# Altium PCB keyMANDevices.PcbDoc
Units mil, origin at the board's own origin, x right, y up, seen from the top; angles counter-clockwise.
Board outline 6000 x 4000 mil, 2 copper layers (Top Layer, Bottom Layer); 37 components, 41 nets, 181 pads, 2 vias.
Unrouted connection lines stored in the file: 95.
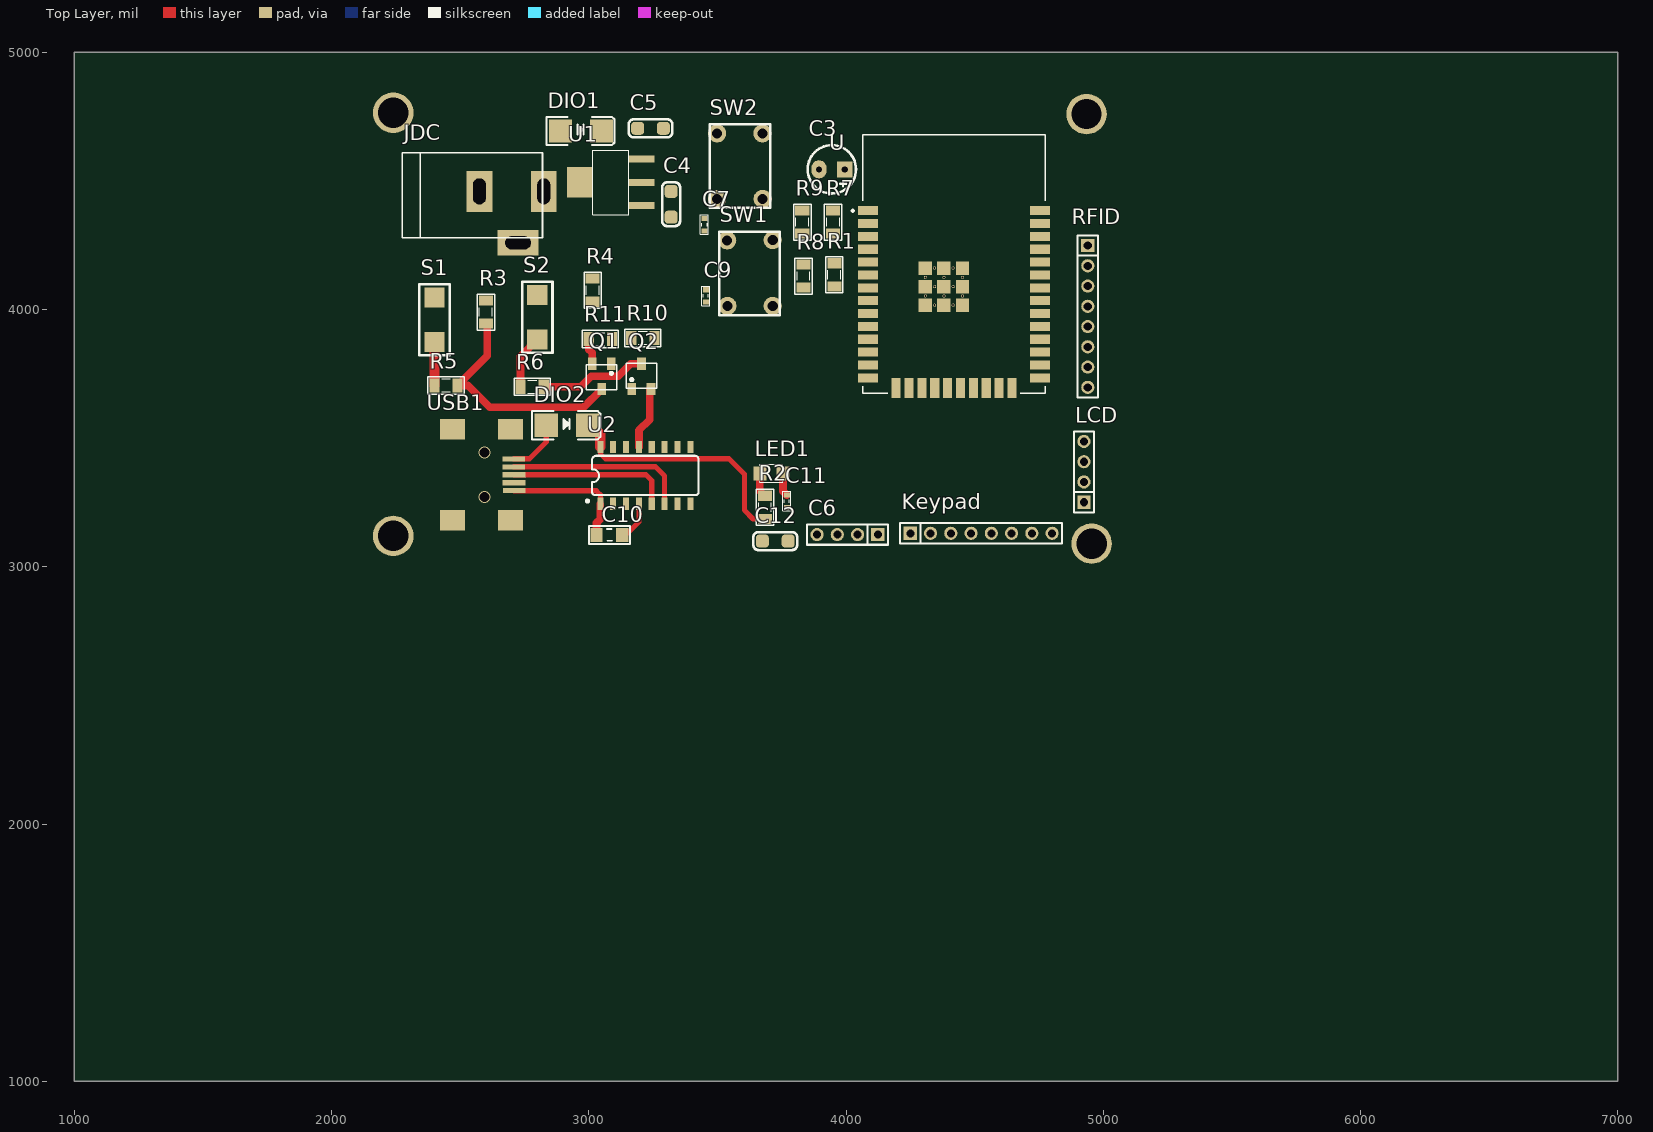
[diagram p0: Top Layer view]
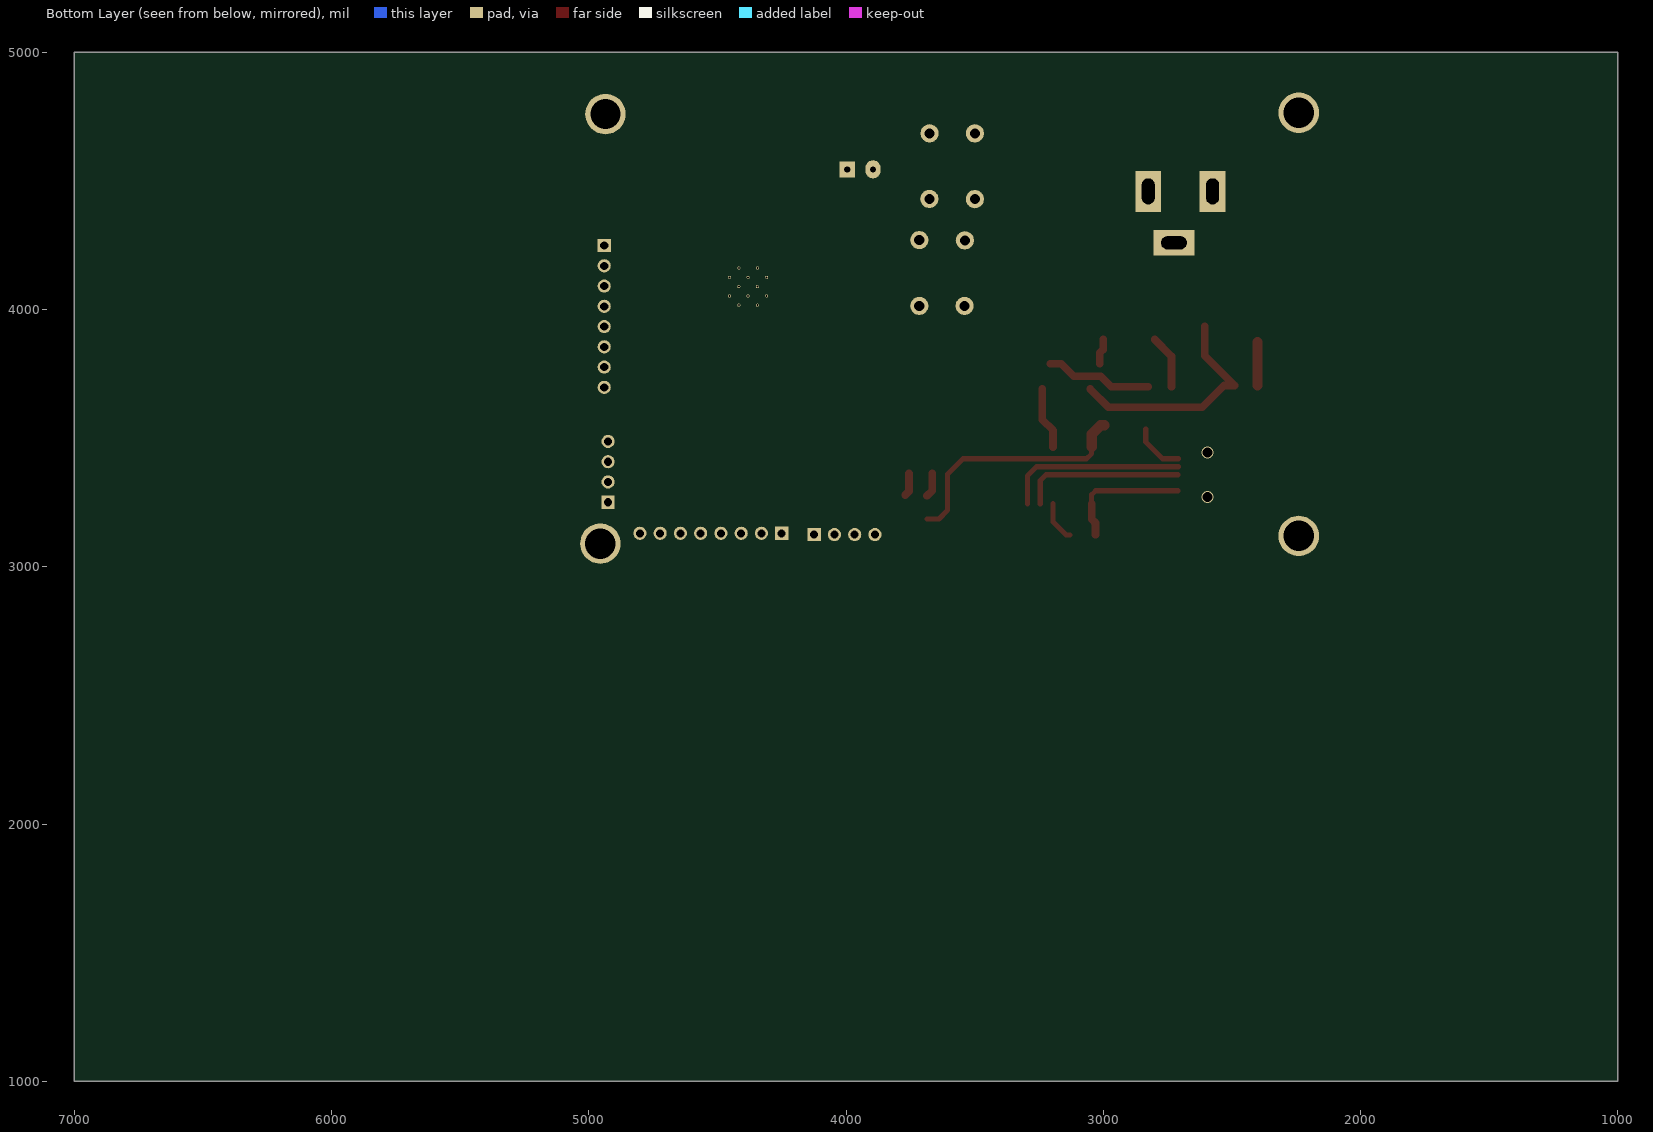
[diagram p1: Bottom Layer view, seen from below]

## Layer stack, top to bottom
Top Solder: solder mask 0.4, Solder Resist, Dk 3.5
Top Layer: signal copper 1.4
Dielectric 1: dielectric 12.6, FR-4, Dk 4.8
Bottom Layer: signal copper 1.4
Bottom Solder: solder mask 0.4, Solder Resist, Dk 3.5

## Board outline
1000,1000 7000,1000 7000,5000 1000,5000

## Design rules (kind name [scope] priority, off if disabled: settings)
Clearance [All] p1: gap=10 ignorepadtopadclearanceinfootprint=FALSE except(0: Arc-Hole Track-Hole SMDPad-Hole THPad-Hole Via-Hole Fill-Hole Poly-Hole Region-Hole Text-Hole)
PolygonConnect [All] p1: connectstyle=Relief reliefconductorwidth=10 reliefentries=4 polygonreliefangle="90 Angle" airgapwidth=10
RoutingVias [All] p1: holewidth=16 width=24 viastyle="Through Hole" minholewidth=16 minwidth=24 maxholewidth=16 maxwidth=24
SolderMaskExpansion [All] p1: expansion=4
Width [All] p1: maxlimit=40 minlimit=20 preferedwidth=30
30 further rules are at their usual default settings.

## Components (designator, comment, footprint, x,y, rotation, side; value= is the part's Value field where it differs from the comment)
C3 "Cap Pol" C3MM 3945,4545 r180 top
C4 "104" CAP_0805#1 3320,4409.37 r90 top value=33p
C5 "104" CAP_0805#1 3240,4704.37 r180 top value=33p
C6 "Motor/Encoder" J4-D1T 4005.63,3125 r180 top
C7 "100nF" CAP_0402 3450,4330 r90 top value=33p
C9 "100nF" CAP_0402 3455,4052.97 r90 top value=33p
C10 "104" CAP_0805#2 3080,3125 r0 top value=33p
C11 "104" CAP_0402 3770,3255 r270 top value=33p
C12 "104" CAP_0805#1 3725,3100 r180 top value=33p
DIO1 "Diode SMD" DIO-SMD-106 2970,4694.37 r180 top value=1N5007
DIO2 "Diode SMD" DIO-SMD-106 2915,3550 r180 top value=1N5007
JDC "Jac DC" DC-IN 2700,4359.37 r0 top
Keypad "KeyPad" J8-D1T 4525.63,3130 r0 top
LCD "LCD_I2C" J4-D1T 4925,3369.04 r90 top
LED1 "LED" LED-0805-Red 3665,3362.67 r0 top value="LED 3 ly Single Colour"
Q1 "2N222" SOT23D 3050,3740 r180 top value=C1815
Q2 "2N222" SOT23D 3205,3739.79 r0 top value=C1815
R1 "10k" RES-SMD-0805 3955,4135 r270 top
R2 "1k" RES-SMD-0805 3685,3231.06 r90 top
R3 "12k" RES-SMD-0805 2600,3990 r90 top
R4 "12k" RES-SMD-0805 3015,4075 r90 top
R5 "470" RES-SMD-0805 2445,3705 r0 top
R6 "470" RES-SMD-0805 2780,3700 r0 top
R7 "10k" RES-SMD-0805 3950,4340 r270 top
R8 "470" RES-SMD-0805 3835,4130 r270 top
R9 "470" RES-SMD-0805 3830,4340 r90 top
R10 "12k" RES-SMD-0805 3210,3890 r0 top
R11 "12k" RES-SMD-0805 3045,3885 r180 top
RFID "RFID" J8-D1T 4940,3973.11 r270 top
S1 "SW-SMD" "SW 3x2x4" 2400,3960 r90 top
S2 "SW-SMD" "SW 3x2x4" 2800,3970 r90 top
SW1 "SW-4P-S" SW-4P-S 3539,4014 r90 top
SW2 "SW-4P-S" SW-4P-S 3675,4685 r270 top
U "ESP32-WROOM-32" MODULE_ESP32-WROOM-32 4420,4177.28 r0 top
U1 "LM1117-ADJ" LM1117-SOP 3155,4494.37 r90 top
U2 "CH340C" SO016 3220,3355 r0 top
USB1 "USB_M" USB_B_MINI_SMD 2708,3419.67 r90 top

## Footprints (in the part's own frame and the unit in brackets; to place one, negate y for a bottom-side part, rotate by r counter-clockwise, add the part's x,y. Pads: shape width x height; smd on the part's side, far side on the other; paste and mask are expansions set on the pad)
C3MM [mm]
  rect 1.5x1.58 hole 0.6: 1(-1.27,0)
  oval 1.5x1.8 hole 0.6: 2(1.27,0)
  silkscreen extent -2.39,-2.39 2.39,2.39, body extent -2,-2.03 1.99,1.97, height 7.01
CAP_0402 [mm]
  rect 0.5x0.6 smd: 1(-0.61,0) 2(0.61,0)
  silkscreen extent -0.97,-0.38 0.97,0.41, body extent -0.5,-0.27 0.5,0.26, height 0.35
CAP_0805#1 [mil]
  rrect50% 50x50 smd: 1(-50,0) 2(50,0)
  silkscreen extent -85,-35 85,35, body extent -40,-25 40,25, height 24
CAP_0805#2 [mil]
  rect 47.24x55.12 smd: 1(-50,-1) 2(50,-1)
  silkscreen extent -80,-36 80,34, body extent -40,-26 40,24, height 24
DC-IN [mil] "Jac DC input"
  rect 100x160 hole 50 slot 100 at 90 deg: 1(125,100) 2(-125,100)
  rect 160x100 hole 50 slot 100 at 0 deg: 3(25,-100)
  silkscreen extent -425,-80 120,250, body extent -410,-105 134,269, height 434
DIO-SMD-106 [mil]
  rect 90x90.55 smd: 1(80,0) 2(-80,0)
  silkscreen extent -130,-55 135,55, body extent -99,-50 106,52, height 95
J4-D1T [mm] "4 pins, 1 row, straight, gold plating"
  rect 1.3x1.3 hole 0.8: 1(-3,0)
  round 1.3 hole 0.8: 2(-1,0) 3(1,0) 4(3,0)
  silkscreen extent -4,-1 4,1, body extent -4,-1 4,1, height 6.01
J8-D1T [mm] "8 pins, 1 row, straight, gold plating"
  rect 1.3x1.3 hole 0.8: 1(-7,0)
  round 1.3 hole 0.8: 2(-5,0) 3(-3,0) 4(-1,0) 5(1,0) 6(3,0) 7(5,0) 8(7,0)
  silkscreen extent -8,-1 8,1, body extent -8,-1 8,1, height 6.01
LED-0805-Red [mil]
  rect 50x55 smd: 1(0,0) 2(90,0)
  silkscreen extent 0,-35 90,35, body extent 5,-25 85,25, height 43
LM1117-SOP [mm]
  rect 0.7x2.54 smd: 1(-2.3,-1.27) 2(0,-1.27) 3(2.3,-1.27)
  rect 3x2.54 smd: 2(0,4.826)
  silkscreen extent -3.18,0 3.17,3.56, body extent -3.25,-1.78 3.25,5.18, height 1.68
MODULE_ESP32-WROOM-32 [mm]
  rect 2x0.9 smd: 1(-8.5,5.26) 2(-8.5,3.99) 3(-8.5,2.72) 4(-8.5,1.45) 5(-8.5,0.18) 6(-8.5,-1.09) 7(-8.5,-2.36) 8(-8.5,-3.63) 9(-8.5,-4.9) 10(-8.5,-6.17) 11(-8.5,-7.44) 12(-8.5,-8.71) 13(-8.5,-9.98) 14(-8.5,-11.25) 25(8.5,-11.25) 26(8.5,-9.98) 27(8.5,-8.71) 28(8.5,-7.44) 29(8.5,-6.17) 30(8.5,-4.9) 31(8.5,-3.63) 32(8.5,-2.36) 33(8.5,-1.09) 34(8.5,0.18) 35(8.5,1.45) 36(8.5,2.72) 37(8.5,3.99) 38(8.5,5.26)
  rect 0.9x2 smd: 15(-5.715,-12.25) 16(-4.445,-12.25) 17(-3.175,-12.25) 18(-1.905,-12.25) 19(-0.635,-12.25) 20(0.635,-12.25) 21(1.905,-12.25) 22(3.175,-12.25) 23(4.445,-12.25) 24(5.715,-12.25)
  rect 1.33x1.33 smd: 39_1(-2.835,-0.405) 39_2(-1,-0.405) 39_3(0.835,-0.405) 39_4(-2.835,-2.24) 39_5(-1,-2.24) 39_6(0.835,-2.24) 39_7(-2.835,-4.075) 39_8(-1,-4.075) 39_9(0.835,-4.075)
  round 0.3 hole 0.2: 39_10(-1.917,-0.405) 39_11(-0.082,-0.405) 39_12(-2.835,-1.322) 39_13(-1,-1.322) 39_14(0.835,-1.322) 39_15(-1.917,-2.24) 39_16(-0.082,-2.24) 39_17(-2.835,-3.157) 39_18(-1,-3.157) 39_19(0.835,-3.157) 39_20(-1.917,-4.075) 39_21(-0.082,-4.075)
  silkscreen extent -10.1,-12.75 9,12.75, body extent -10.54,-12.75 8.98,12.75, height 3.2
RES-SMD-0805 [mil]
  rect 39.37x55 smd: 1(-45,0) 2(45,0)
  silkscreen extent -70,-34 70,33, body extent -39,-25 39,25, height 31
SO016 [mm]
  rect 0.6x1.2 smd: 1(-4.445,-2.8) 2(-3.175,-2.8) 3(-1.905,-2.8) 4(-0.635,-2.8) 5(0.635,-2.8) 6(1.905,-2.8) 7(3.175,-2.8) 8(4.445,-2.8) 9(4.445,2.8) 10(3.175,2.8) 11(1.905,2.8) 12(0.635,2.8) 13(-0.635,2.8) 14(-1.905,2.8) 15(-3.175,2.8) 16(-4.445,2.8)
  silkscreen extent -5.84,-2.67 5.26,1.95
SOT23D [mm] "SOT 23C - 1-3-2 - BCE"
  rect 0.85x1.2 smd: 1(-0.95,-1.25) 2(0.94,-1.245) 3(0,1.25)
  silkscreen extent -1.5,-1.14 1.5,1.32, body extent -1.5,-1.17 1.5,1.33, height 1.06
"SW 3x2x4" [mm]
  rect 2x2 smd: 1(-2.2,0) 2(2.2,0)
  silkscreen extent -3.5,-1.5 3.5,1.5, body extent -2.45,-1.45 2.45,1.45, height 2
SW-4P-S [mm]
  round 1.8 hole 1: 1(0,0) 2(0,-4.47) 3(6.502,-4.47) 4(6.477,0.025)
  silkscreen extent -0.91,-5.18 7.34,0.79, body extent -0.86,-5.23 7.35,0.76, height 9.52
USB_B_MINI_SMD [mm]
  rect 2x2.5 smd: 0(-6.075,0.305) 0(-6.071,6.045) 0(2.925,0.305) 0(2.929,6.045)
  rect 0.5x2.25 smd: 1(0,0) 2(-0.787,-0.013) 3(-1.575,-0.025) 4(-2.362,-0.038) 5(-3.15,-0.051)
  body extent -6.92,-0.37 3.78,8.83, height 3.95

## Part data
C3: "Polarized Capacitor (Axial)", LatestRevisionDate=17-Jul-2002, LatestRevisionNote="Re-released for DXP Platform.", PackageReference=POLAR0.8, Published=8-Jun-2000, Publisher="Altium Limited"
C4 C5 C7 C9 C10 C11 C12: library part CapSMD, "Capacitor", LatestRevisionDate=17-Jul-2002, LatestRevisionNote="Re-released for DXP Platform.", PackageReference=RAD-0.3, Published=8-Jun-2000, Publisher="Altium Limited"
C6 LCD: library part JP4x1-2.0, "WR-PHD 2.00 mm Socket Header", Manufacturer="Würth Elektronik eiSos GmbH", partNo=62000411821, ComponentLink1 Description=Manufacturer, ComponentLink1URL=http://www.we-online.com, ComponentLink2 Description=Datasheet, ComponentLink2URL=http://katalog.we-online.de/em/datasheet/6200xx11821.pdf, Created by="Karrer Zheng", Created Date="2 April 2013", NoPins=04
DIO1 DIO2: "Default Diode", Code - JEDEC=DO-214-AB, Published=8-Jun-2000, Publisher="Altium Limited", Revision="July-2002: Re-released for DXP Platform."
JDC: library part DCIN, "Jac DC input"
Keypad RFID: library part JP8x1-2.0, "WR-PHD 2.00 mm Socket Header", Manufacturer="Würth Elektronik eiSos GmbH", partNo=62000811821, ComponentLink1 Description=Manufacturer, ComponentLink1URL=http://www.we-online.com, ComponentLink2 Description=Datasheet, ComponentLink2URL=http://katalog.we-online.de/em/datasheet/6200xx11821.pdf, Created by="Karrer Zheng", Created Date="2 April 2013", NoPins=08
LED1: "LED Single colour Green and Red"
Q1 Q2: "NPN 600mW, ECB", =C2383
R1 R2 R3 R4 R5 R6 R7 R8 R9 R10 R11: library part "Resistor - SMD", "Resistor", Manufacturer="Generic Components", Class=Passive, Published=08/06/2000, Publisher="Altium Hobart Technology Centre"
S1 S2: "Switch", LatestRevisionDate=17-Jul-2002, LatestRevisionNote="Re-released for DXP Platform.", PackageReference=SPST-2, Published=24-Mar-1999, Publisher="Altium Limited"
SW1 SW2: library part SW-4PIN-SMALL, "Switch Small 4 Pin", LatestRevisionDate=17-Jul-2002, LatestRevisionNote="Re-released for DXP Platform.", PackageReference=SPST-2, Published=24-Mar-1999, Publisher="Altium Limited"
U: "Bluetooth, WiFi Transceiver Module 2.4GHz ~ 2.5GHz Surface Mount", Package="Module Espressif Systems", Digi-Key_Part_Number=1904-1010-1-ND, Digi-Key_Purchase_URL=https://www.digikey.com/product-detail/en/espressif-systems/ESP32-WROOM-32/1904-1010-1-ND/8544305?utm_source=snapeda&utm_medium=aggregator&utm_campaign=symbol, MF="Espressif Systems", MP=ESP32-WROOM-32, SnapEDA_Link=https://www.snapeda.com/parts/ESP32-WROOM-32/Espressif%20Systems/view-part/2753322/?ref=snap
U1: "800mA Low-Dropout Linear Regulator", Creator="Nguyen Ba Bien", Website=http://group3i.net
U2: "USB to serial chip CH340", Package=Package, Availability=Unavailable, Check_prices=https://www.snapeda.com/parts/CH340C/WCH/view-part/5428851/?ref=eda, MF=WCH, MP=CH340C, Price=None, SnapEDA_Link=https://www.snapeda.com/parts/CH340C/WCH/view-part/5428851/?ref=snap

## Free pads (board coordinates)
  round 157.48 hole 118.11: 2(2240,4765) 3(4935,4760) 4(4955,3090) 5(2240,3120)

## Via types
v1: diameter 47.24, hole 39.37, Top Layer to Bottom Layer, 2 vias

## Nets (pads, with @x,y where several pads share a name; then routed paths per layer and width w, separated by ;. In a path a pad name is that pad's centre, name@x,y a point inside that pad or via, vN(x,y) a via of type N, cw(c..) or ccw(c..) an arc to the next point about the centre after c; other vN are vias at no path point)
AccessPoint: C9.2 R7.2 SW2.2 SW2.3 U.7
BOOT: Q2.3 R4.1 R6.2 U.25 | length 416.9
  Top Layer w30: R6.2 2968.86,3700 3009.24,3740.38 3114.28,3740.38 3162.9,3789 Q2.3
COL1: Keypad.5 U.24
COL2: Keypad.6 U.26
COL3: Keypad.7 U.27
COL4: Keypad.8 U.28
Control: C7.2 R1.2 SW1.2 SW1.3 U.6
DTR: Q2.2 R10.2 U2.13 | length 242.9
  Top Layer w30: U2.13 3195,3530 3237,3572 Q2.2@3237,3690.79
EN: Q1.3 R3.1 R5.2 U.3 | length 902.2
  Top Layer w30: R3.1@2605,3935 2605,3820 R5.2 2530,3705 2615,3620 2779.37,3620 2779.64,3620.28 2979.49,3620.28 Q1.3
Encoder: C6.3 U.11
GND: C3.2 C4.1 C5.1 C6.2 C6.4 C7.1 C9.1 C10.1 C11.1 C12.1 JDC.2 JDC.3 LCD.1 LED1.2 RFID.3 S1.2 S2.2 SW1.1 SW1.4 SW2.1 SW2.4 U1.1 U2.1 U.1 U.15 U.38 U.39_1 U.39_2 U.39_3 U.39_4 U.39_5 U.39_6 U.39_7 U.39_8 U.39_9 U.39_10 U.39_11 U.39_12 U.39_13 U.39_14 U.39_15 U.39_16 U.39_17 U.39_18 U.39_19 U.39_20 U.39_21 USB1.5 | length 593.6
  Top Layer w20: USB1.5 3029.33,3295.67 3045,3280 U2.1
  Top Layer w30: C10.1 3030,3170 3045,3185 U2.1 ; LED1.2 3755,3294 C11.1
IRQ: RFID.4
MISO: RFID.5 U.31
MOSI: RFID.6 U.37
Motor: C6.1 U.10
NetC10_2: C10.2 U2.4 | length 155.9
  Top Layer w20: C10.2 3144,3124 3195,3175 U2.4
NetDIO1_1: DIO1.1 JDC.1
NetDIO2_1: DIO2.1 USB1.1 | length 204.1
  Top Layer w20: USB1.1 2769.67,3419.67 2835,3485 DIO2.1@2835,3535
NetLED1_1: LED1.1 R2.2 | length 94.9
  Top Layer w30: LED1.1 3665,3296.05 R2.2
NetQ1_1: Q1.1 R10.1
NetQ2_1: Q2.1 R11.1
NetR5_1: R5.1 S1.1 | length 168.4
  Top Layer w40: R5.1 S1.1
NetR6_1: R6.1 S2.1 | length 210.3
  Top Layer w30: R6.1 2735,3818.39 S2.1
NetR8_1: R8.1 U2.2
NetR9_1: R9.1 U2.3
ROW1: Keypad.1 U.13
ROW2: Keypad.2 U.14
ROW3: Keypad.3 U.16
ROW4: Keypad.4 U.23
RST: RFID.2
RTS: Q1.2 R11.2 U2.14 | length 101.4
  Top Layer w30: R11.2 3000,3845 3013,3832 Q1.2
RX0: R8.2 U.34
SCK: RFID.7 U.30
SCL_I2C: LCD.4 U.36
SDA_I2C: LCD.3 U.33
SS: RFID.8 U.29
TX0: R9.2 U.35
UD+: U2.5 USB1.3 | length 635.6
  Top Layer w20: USB1.3 3222.33,3357.67 3245,3335 U2.5
UD-: U2.6 USB1.2 | length 709.3
  Top Layer w20: USB1.2 3259,3388.67 3295,3352.67 U2.6
VDD3V3: C3.1 C4.2 R1.1 R3.2 R4.2 R7.1 RFID.1 U1.2 U.2
VDD5V: C5.2 C11.2 C12.2 DIO1.2 DIO2.2 LCD.2 R2.1 U1.3 U2.16 | length 966.9
  Top Layer w20: U2.16 3045,3439.67 3065,3419.67 3545.33,3419.67 3605,3360 3605,3220 3638.95,3186.05 R2.1
  Top Layer w40: DIO2.2 3010,3550 3045,3515 U2.16
pads on no net: U2.7 U2.8 U2.9 U2.10 U2.11 U2.12 U2.15 U.4 U.5 U.8 U.9 U.12 U.17 U.18 U.19 U.20 U.21 U.22 U.32 USB1.0 USB1.4
copper on no net:
  other v1: 2594.43,3271.05 2594.43,3444.28

## Text inside footprints (layer, text, board x,y; h text height)
U: Mechanical 13 "ANTENNA" at 4183.78,4531.61 h70